# Altium PCB qbI0000115v1.1.1.PcbDoc
Units mm, origin at the board's own origin, x right, y up, seen from the top; angles counter-clockwise.
Board outline 9 x 7 mm, 2 copper layers (Top Layer, Bottom Layer), stack 0.325 mm thick; 6 components, 11 nets, 55 pads, 22 vias.
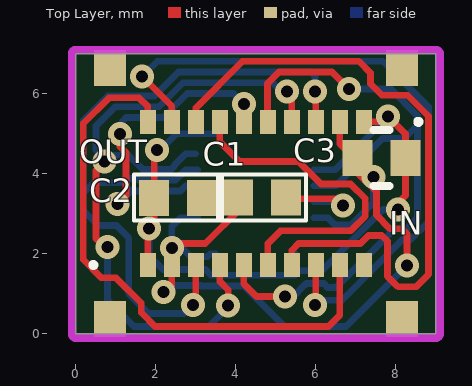
[diagram p0: Top Layer view]
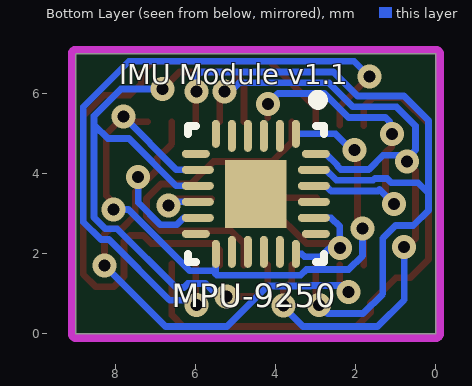
[diagram p1: Bottom Layer view, seen from below]
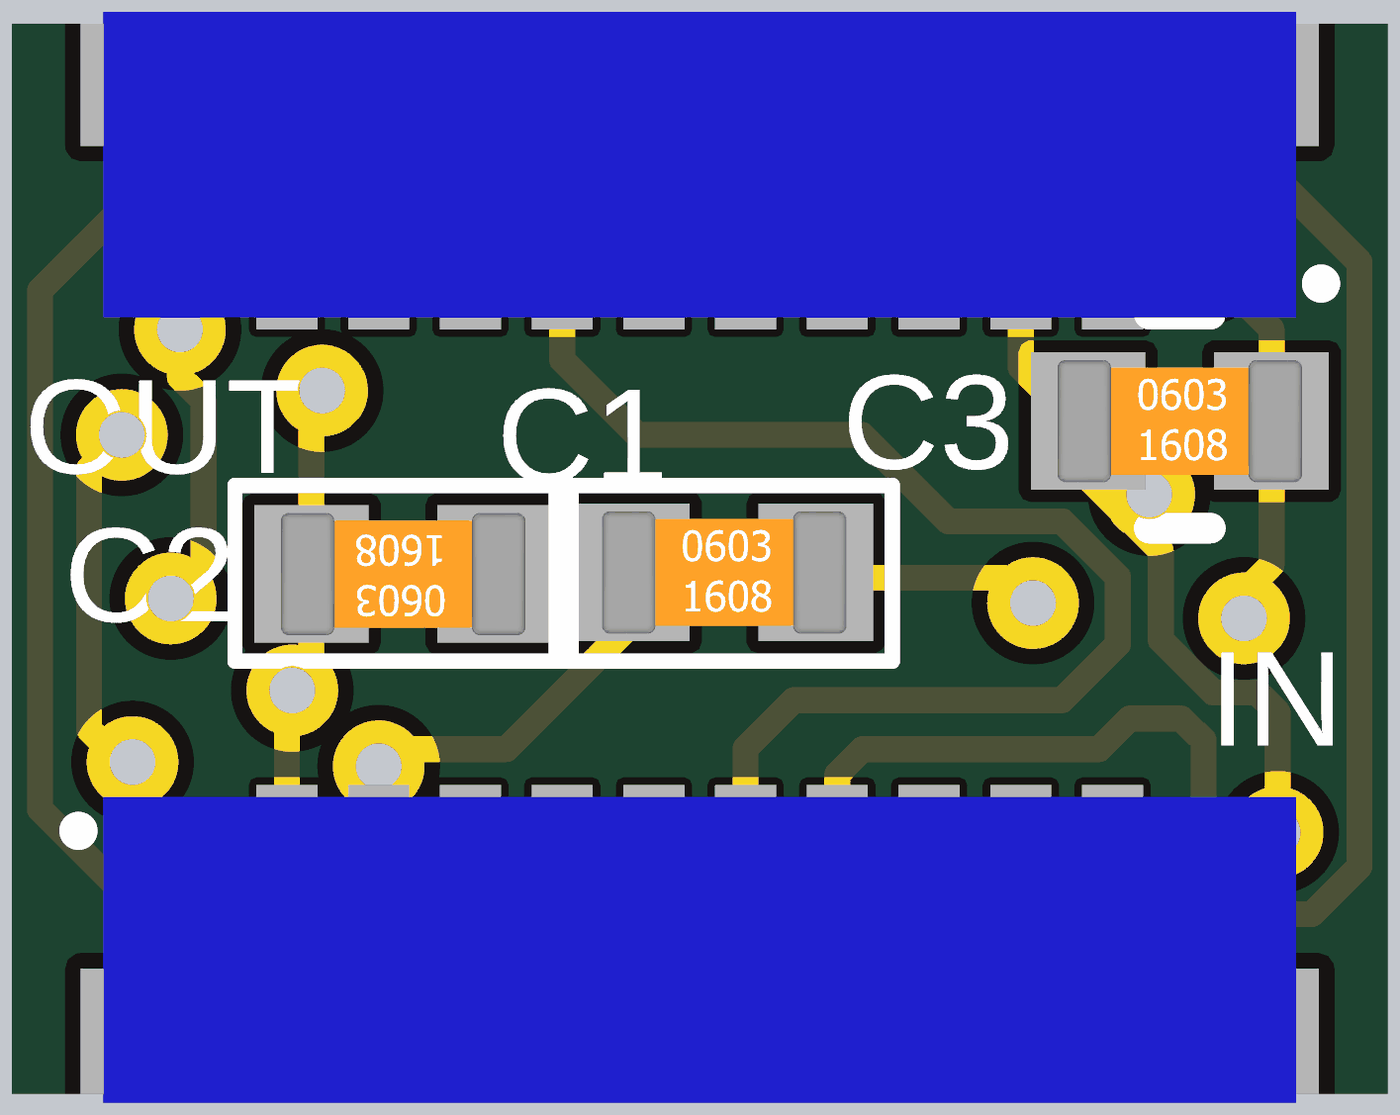
[diagram p2: 3D render of the assembled board from above, using the file's embedded part models]

## Layer stack, top to bottom
Top Solder: solder mask 0.0102, Solder Resist, Dk 3.5
Top Layer: signal copper 0.0356
Dielectric 1: core 0.254, FR-4, Dk 4.2
Bottom Layer: signal copper 0.0356
Solder Side: solder mask 0.0102, Solder Resist, Dk 3.5

## Board outline
0,7 0,0 9,0 9,7

## Design rules (kind name [scope] priority, off if disabled: settings)
Clearance Clearance_3 [OnLayer('Power Plane (VCC)') or InNet('4V')] p1: gap=0.254
Clearance Clearance_2 [(InComponent('MPU-9250') AND OnLayer('Bottom Layer') AND HasFootprint('MPU-2950'))] p2: gap=0.1
Clearance keepout [OnLayer('Keep-Out Layer')] p3: gap=0.1
Clearance "Clearance - Vias Pad" [IsVia vs IsPad] p4: gap=0.1
Clearance "Clearance Pad to Pad" [IsPad vs IsPad] p5: gap=0.1
Clearance [All] p6: gap=0.1
DiffPairsRouting [All] p1: maxlimit=0.254 minlimit=0.254 mostfreqgap=0.254 toplayer_minwidth=0.2 toplayer_maxwidth=0.381 toplayer_prefwidth=0.254 bottomlayer_minwidth=0.2 bottomlayer_maxwidth=0.381 bottomlayer_prefwidth=0.254 maxuncoupledlength=12.7
HoleToHoleClearance [All] p1: gap=0.1 allowstackedmicrovias=TRUE
MinimumSolderMaskSliver [All] p1: minsoldermaskwidth=0.02
PlaneConnect [All] p1: planeconnectstyle=Direct reliefexpansion=0.508 reliefentries=4 reliefconductorwidth=0.254 reliefairgap=0.254
PolygonConnect [All] p1: connectstyle=Direct reliefconductorwidth=0.254 reliefentries=4 polygonreliefangle="90 Angle" airgapwidth=0.254
RoutingLayers RoutingLayersPWR [(InNet('4V') OR InNet('5V') OR InNet('5V NON ISOLATED'))] p2: top layer_v5=TRUE bottom layer_v5=TRUE
RoutingPriority "RountingPriority Power" [(InNet('GND') OR InNet('POWER GND') OR InNet('5V') OR InNet('5V NON ISOLATED') OR InNet('24V'))] p1: routingpriority=10
RoutingPriority "RoutingPriority RS485" [(InNet('RS485_N') OR InNet('RS485_P'))] p2: routingpriority=8
RoutingPriority "RoutingPriority Hard Ones" [(InNet('SIGNAL 1 A') OR InNet('SIGNAL 1 B') OR InNet('SIGNAL 1 C') OR InNet('SIGNAL 3 A') OR InNet('SIGNAL 3 B') OR InNet('SIGNAL 3 C'))] p3: routingpriority=6
RoutingPriority [All] p4: routingpriority=0
RoutingVias RoutingVias_2 [InNet('24V')] p1: holewidth=0.711 width=1.27 viastyle="Through Hole" minholewidth=0.6 minwidth=1 maxholewidth=1.5 maxwidth=2
RoutingVias RoutingVias_3 [InNet('POWER GND')] p2: holewidth=0.711 width=1.27 viastyle="Through Hole" minholewidth=0.5 minwidth=1 maxholewidth=1.5 maxwidth=2
RoutingVias RoutingVias_1 [(InNet('MOTOR 1 A') OR InNet('MOTOR 1 B') OR InNet('MOTOR 1 SENSE') OR InNet('MOTOR 2 A') OR InNet('MOTOR 2 B') OR InNet('MOTOR 2 SENSE'))] p3: holewidth=0.3 width=0.7 viastyle="Through Hole" minholewidth=0.3 minwidth=0.7 maxholewidth=0.3 maxwidth=0.7
RoutingVias [All] p4: holewidth=0.254 width=0.508 viastyle="Through Hole" minholewidth=0.254 minwidth=0.508 maxholewidth=0.35 maxwidth=0.7
SMDNeckDown [All] p1: percent=90.000
SilkToSilkClearance [All] p1: silktosilkclearance=0.1
SilkToSolderMaskClearance SilkscreenOverComponentPads [IsPad] p1: minsilkscreentomaskgap=0.02 clearancetoexposedcopper=FALSE
SolderMaskExpansion SolderMaskExpansion_via [IsVia] p1: expansion=-0.4
SolderMaskExpansion [All] p2: expansion=0.102
Width [All] p1: maxlimit=2 minlimit=0.17 preferedwidth=0.254 minimp=50.000000 maximp=50.000000 favimp=50.000000
Width "Width PowerPlane" [All] p2: maxlimit=0.635 minlimit=0.508 preferedwidth=0.508
23 further rules are at their usual default settings.

## Components (designator, comment, footprint, x,y, rotation, side; value= is the part's Value field where it differs from the comment)
C1 "100nF" C0603C104K5RACAUTO 4.66,3.41 r0 top
C2 "100nF" C0603C104K5RACAUTO 2.56,3.4 r180 top
C3 "10nF" C0603C103J8RACTU 7.64,4.4 r0 top
IN "JST SM10B-XSRS-ETB" SM10B-XSRS-ETB 4.5,1.72 r0 top
MPU-9250 "MPU-9250" MPU-2950 4.5,3.5 r270 bottom
OUT "JST SM10B-XSRS-ETB" SM10B-XSRS-ETB 4.5,5.3 r180 top

## Footprints (in the part's own frame and the unit in brackets; to place one, negate y for a bottom-side part, rotate by r counter-clockwise, add the part's x,y. Pads: shape width x height; smd on the part's side, far side on the other; paste and mask are expansions set on the pad)
C0603C103J8RACTU [mm] "Kemet C10nF 0603 10VDC 5% X7R"
  rect 0.75x0.9 smd paste+0 mask+0.08: 1(-0.6,0)
  rect 0.75x0.9 smd mask+0.08: 2(0.6,0)
  silkscreen extent -0.2,-0.7 0.2,0.7, body extent -0.8,-0.4 0.8,0.4, height 0.8
C0603C104K5RACAUTO [mm] "KEMET 100nF 50VDC 0603 1608 10% X7R"
  rect 0.75x0.9 smd paste+0 mask+0.08: 1(-0.6,0)
  rect 0.75x0.9 smd mask+0.08: 2(0.6,0)
  silkscreen extent -1.1,-0.58 1.1,0.57, body extent -0.8,-0.4 0.8,0.4, height 0.8
MPU-2950 [mm] "QFN, 24-Leads, Body 3,00x3,00mm, Pitch 0,40mm, Thermal Pad 1,70x1,54mm, IPC Medium Density"
  oval 0.7x0.2 smd mask+0.05: 1(-1.5,1) 6(-1.5,-1) 13(1.5,-1) 18(1.5,1)
  oval 0.8x0.2 smd mask+0.05: 2(-1.45,0.6) 3(-1.45,0.2) 4(-1.45,-0.2) 5(-1.45,-0.6) 14(1.45,-0.6) 15(1.45,-0.2) 16(1.45,0.2) 17(1.45,0.6)
  oval 0.2x0.7 smd mask+0.05: 7(-1,-1.5) 12(1,-1.5) 19(1,1.5) 24(-1,1.5)
  oval 0.2x0.8 smd mask+0.05: 8(-0.6,-1.45) 9(-0.2,-1.45) 10(0.2,-1.45) 11(0.6,-1.45) 20(0.6,1.45) 21(0.2,1.45) 22(-0.2,1.45) 23(-0.6,1.45)
  rect 1.7x1.54 smd mask+0.05: 25(0,0)
  silkscreen extent -2.47,-1.7 1.7,1.7, body extent -1.5,-1.5 1.5,1.5, height 1
SM10B-XSRS-ETB [mm] "JST XSR 10WAY angle, 0.6mm, SMD"
  rect 0.4x0.6 smd mask+0.05: 1(-2.7,0) 2(-2.1,0) 3(-1.5,0) 4(-0.9,0) 5(-0.3,0) 6(0.3,0) 7(0.9,0) 8(1.5,0) 9(2.1,0) 10(2.7,0)
  rect 0.8x0.9 smd: NC(-3.65,-1.35) NC(3.65,-1.35)
  silkscreen extent -4.11,-0.05 -4.01,0.05, body extent -3.9,-1.78 3.9,0.22, height 1.44

## Part data
C1 C2: library part C0603C104K5RACAUTO, "KEMET 100nF 0603 Cer 50VDC 10% X7R MLCC"
C3: library part C0603C103J8RACTU, "Kemet C 10nF 0603 Cer 10VDC 5% X7R MLCC"
IN OUT: library part SM10B-XSRS-ETB, "JST 10WAY angle XSR, SMT, 0.6mm, SM10B-XSRS-ETB"
MPU-9250: "MPU-9250 3X3X1 24QFN"

## Via types
v1: diameter 0.6, hole 0.3, Top Layer to Bottom Layer, 21 vias
v2: diameter 0.6/0.6 (per signal layer), hole 0.3, Top Layer to Bottom Layer, 1 vias

## Nets (pads, with @x,y where several pads share a name; then routed paths per layer and width w, separated by ;. In a path a pad name is that pad's centre, name@x,y a point inside that pad or via, vN(x,y) a via of type N, cw(c..) or ccw(c..) an arc to the next point about the centre after c; other vN are vias at no path point)
CSI: MPU-9250.22 OUT.6 | length 8.4
  Top Layer w0.17: v1(1.04,3.24) 1.255,3.455 1.255,4.532 1.1,4.687 v1(1.1,5) ; OUT.6@4.2,5.4 v1(4.2,5.75)
  Bottom Layer w0.17: v1(1.04,3.24) 1.411,3.611 1.453,3.57 2.617,3.57 2.747,3.7 MPU-9250.22 ; v1(1.1,5) 1.16,5.06 1.16,5.31 1.255,5.405 2.185,5.405 2.785,6.005 3.945,6.005 v1(4.2,5.75) v1@4.16,5.75 ; v1@4.1,5.81 v1@4.16,5.75 ; v1@4.14,5.77 v1@4.16,5.75
GND: C1.1 C2.1 C3.1 IN.2 MPU-9250.11 MPU-9250.18 MPU-9250.20 OUT.2 | length 21.2
  Top Layer w0.17: v1(2.186,1.04) 2.186,0.984 2.4,1.199 IN.2 ; v1(2.4,2.143) 2.512,2.255 3.235,2.255 4.13,3.15 C1.1@4.13,3.4 ; C2.1@2.98,3.4 C1.1@4.18,3.4 ; OUT.2 6.6,4.75 6.97,4.38 6.97,4.099 7.515,3.554 7.515,2.969 7.859,2.625 8.148,2.625 8.28,2.493 v1(8.28,1.71)
  Bottom Layer w0.17: v1(2.186,1.04) 2.351,1.205 3.127,1.205 3.137,1.195 4.208,1.195 5.218,0.185 6.755,0.185 v1(8.28,1.71) ; v1(2.4,2.143) v1@2.4,2.28 ; MPU-9250.20 2.62,2.9 2.4,2.68 v1@2.4,2.28 ; MPU-9250.18 3.36,2 3.288,1.928 2.872,1.928 2.46,2.34 v1@2.4,2.28 ; MPU-9250.11 6.304,2.9 6.479,2.725 6.881,2.725 7.44,3.284 v1(7.44,3.92)
NetC1_2: C1.2 MPU-9250.10 | length 1.6
  Top Layer w0.17: C1.2@5.61,3.375 v1@6.495,3.375
  Bottom Layer w0.17: MPU-9250.10 v1@6.7,3.3
  other v1: 6.68,3.21
NetIN_6: IN.6 OUT.7 | length 8.4
  Top Layer w0.17: OUT.7 3.6,4.8 4.09,4.31 5.563,4.31 6.128,3.745 6.872,3.745 7.235,3.382 7.235,2.938 6.922,2.625 6.872,2.575 5.115,2.575 4.8,2.26 IN.6
NetIN_7: IN.7 OUT.8 | length 16.5
  Top Layer w0.17: OUT.8@3,5.2 3,5.65 4.165,6.815 7.075,6.815 7.365,6.525 7.365,6.253 7.653,5.965 8.29,5.965 8.815,5.44 8.815,1.488 8.502,1.175 8.058,1.175 7.795,1.438 7.795,2.315 7.755,2.355 7.747,2.355 7.647,2.455 7.314,2.455 7.114,2.255 6.085,2.255 5.565,2.255 5.4,2.09 IN.7
NetIN_8: IN.8 OUT.9 | length 17.1
  Top Layer w0.17: v1(1.66,6.43) 2.4,5.69 OUT.9@2.4,5.22 ; v1(5.98,0.72) 5.98,0.64 6,0.66 IN.8@6,1.75
  Bottom Layer w0.17: v1(1.66,6.43) 2.045,6.815 5.992,6.815 7.674,6.815 8.815,5.674 8.815,2.797 8.373,2.355 8.168,2.355 6.653,0.84 6.01,0.84 5.98,0.81 v1(5.98,0.72)
NetIN_9: IN.9 OUT.10 | length 14.5
  Top Layer w0.17: OUT.10@1.8,5.2 1.8,5.68 1.58,5.9 0.83,5.9 0.185,5.255 0.185,1.86 0.645,1.4 1.002,1.4 1.635,0.767 1.635,0.53 1.98,0.185 6.317,0.185 6.6,0.467 IN.9@6.6,1.75
SCK: IN.3 MPU-9250.23 OUT.3 | length 18.6
  Top Layer w0.17: v2(2.926,0.72) 3,0.794 IN.3 ; v1(5.98,6.06) 6,6.04 6,5.4 OUT.3
  Bottom Layer w0.17: v2(2.926,0.72) 2.711,0.505 1.82,0.505 1.325,1 1.325,2.392 1.012,2.705 0.565,2.705 0.185,3.085 0.185,3.52 ; MPU-9250.23 2.747,4.1 2.487,3.84 1.565,3.84 1.523,3.881 1.216,3.881 1.11,3.775 0.44,3.775 0.185,3.52 ; v1(5.98,6.06) 5.98,6.445 5.88,6.545 2.561,6.545 1.961,5.945 0.797,5.945 0.185,5.333 0.185,3.52
SDI: IN.4 MPU-9250.24 OUT.4 | length 18.2
  Top Layer w0.17: v1@0.72,2.17 0.505,2.385 0.505,4.085 0.72,4.3 v1(0.72,4.31) ; IN.4 3.6,1.31 3.81,1.1 v1(3.81,0.71) ; v1(5.28,6.06) 5.28,6.03 5.25,6 5.34,5.91 5.4,5.85 OUT.4
  Bottom Layer w0.17: v1(0.79,2.17) 0.79,0.85 1.455,0.185 3.322,0.185 3.81,0.673 v1(3.81,0.71) ; MPU-9250.24 2.747,4.5 2.465,4.218 2.465,4.2 2.375,4.11 1.677,4.11 1.322,4.465 0.878,4.465 0.877,4.467 v1(0.72,4.31) 0.72,4.335 0.742,4.358 0.505,4.595 0.505,5.2 0.98,5.675 2.073,5.675 2.673,6.275 4.925,6.275 5.22,5.98 5.28,6.04 v1(5.28,6.06)
SDO: IN.5 MPU-9250.9 OUT.5 | length 16.9
  Top Layer w0.17: IN.5 4.2,1.25 4.52,0.93 v1(5.23,0.93) ; OUT.5 4.795,5.305 4.795,6.261 5.079,6.545 6.405,6.545 v1(6.83,6.12)
  Bottom Layer w0.17: v1(5.23,0.93) 5.347,0.93 5.39,0.887 5.758,1.255 6.202,1.255 6.297,1.16 6.5,1.16 7.965,2.625 8.261,2.625 8.545,2.909 8.545,5.452 7.877,6.12 v1(6.83,6.12) ; MPU-9250.9 6.49,3.7 7.67,4.88 8.201,4.88 8.535,5.214
VDD: C2.2 C3.2 IN.1 MPU-9250.1 MPU-9250.8 MPU-9250.13 OUT.1 | length 18.5
  Top Layer w0.17: IN.1 1.8,2.604 v1(1.835,2.638) 1.96,2.764 C2.2 1.96,4.53 v1(2.03,4.6) ; OUT.1 v1@7.74,5.3 ; v1(7.81,5.43) 8.24,5 C3.2 8.24,3.46 8.06,3.28 v1(8.06,3.11)
  Bottom Layer w0.17: v1(1.835,2.638) 1.835,1.951 2.178,1.608 3.239,1.608 3.382,1.465 5.477,1.465 5.516,1.504 5.516,1.575 ; v1(2.03,4.6) 2.11,4.6 2.51,5 MPU-9250.1 ; 5.5,1.52 5.5,1.575 ; MPU-9250.13 5.5,1.575 ; MPU-9250.8 6.48,4.1 v1(7.81,5.43) ; v1(8.06,3.11) 7.68,3.11 6.145,1.575 5.516,1.575 ; 5.5,1.575 5.516,1.575
pads on no net: IN.10 IN.NC MPU-9250.2 MPU-9250.3 MPU-9250.4 MPU-9250.5 MPU-9250.6 MPU-9250.7 MPU-9250.12 MPU-9250.14 MPU-9250.15 MPU-9250.16 MPU-9250.17 MPU-9250.19 MPU-9250.21 MPU-9250.25 OUT.NC

## Keep-outs
Keep-Out Layer:
  lines w0.2: -0.1,0 ccw(c0,0) 0,-0.1 ; -0.1,0 ccw(c0,0) 0,-0.1 ; -0.1,0 -0.1,7 ; -0.1,7 cw(c0,7) 0,7.1 ; -0.1,7 cw(c0,7) 0,7.1 ; 0,-0.1 9,-0.1 ; 0,7.1 9,7.1 ; 9,-0.1 ccw(c9,0) 9.1,0 ; 9,-0.1 ccw(c9,0) 9.1,0 ; 9,7.1 cw(c9,7) 9.1,7 ; 9,7.1 cw(c9,7) 9.1,7 ; 9.1,0 9.1,7

## Silkscreen, mask and mechanical layers (free items; w line width, h text height)
Bottom Overlay:
  text "IMU Module v1.1" at 7.91,6.24 h0.5